# Altium PCB WeightPCB.PcbDoc
Units mil, origin at the board's own origin, x right, y up, seen from the top; angles counter-clockwise.
Board outline 2065 x 1130 mil, 2 copper layers (Top Layer, Bottom Layer); 4 components, 8 nets, 30 pads, 0 vias.
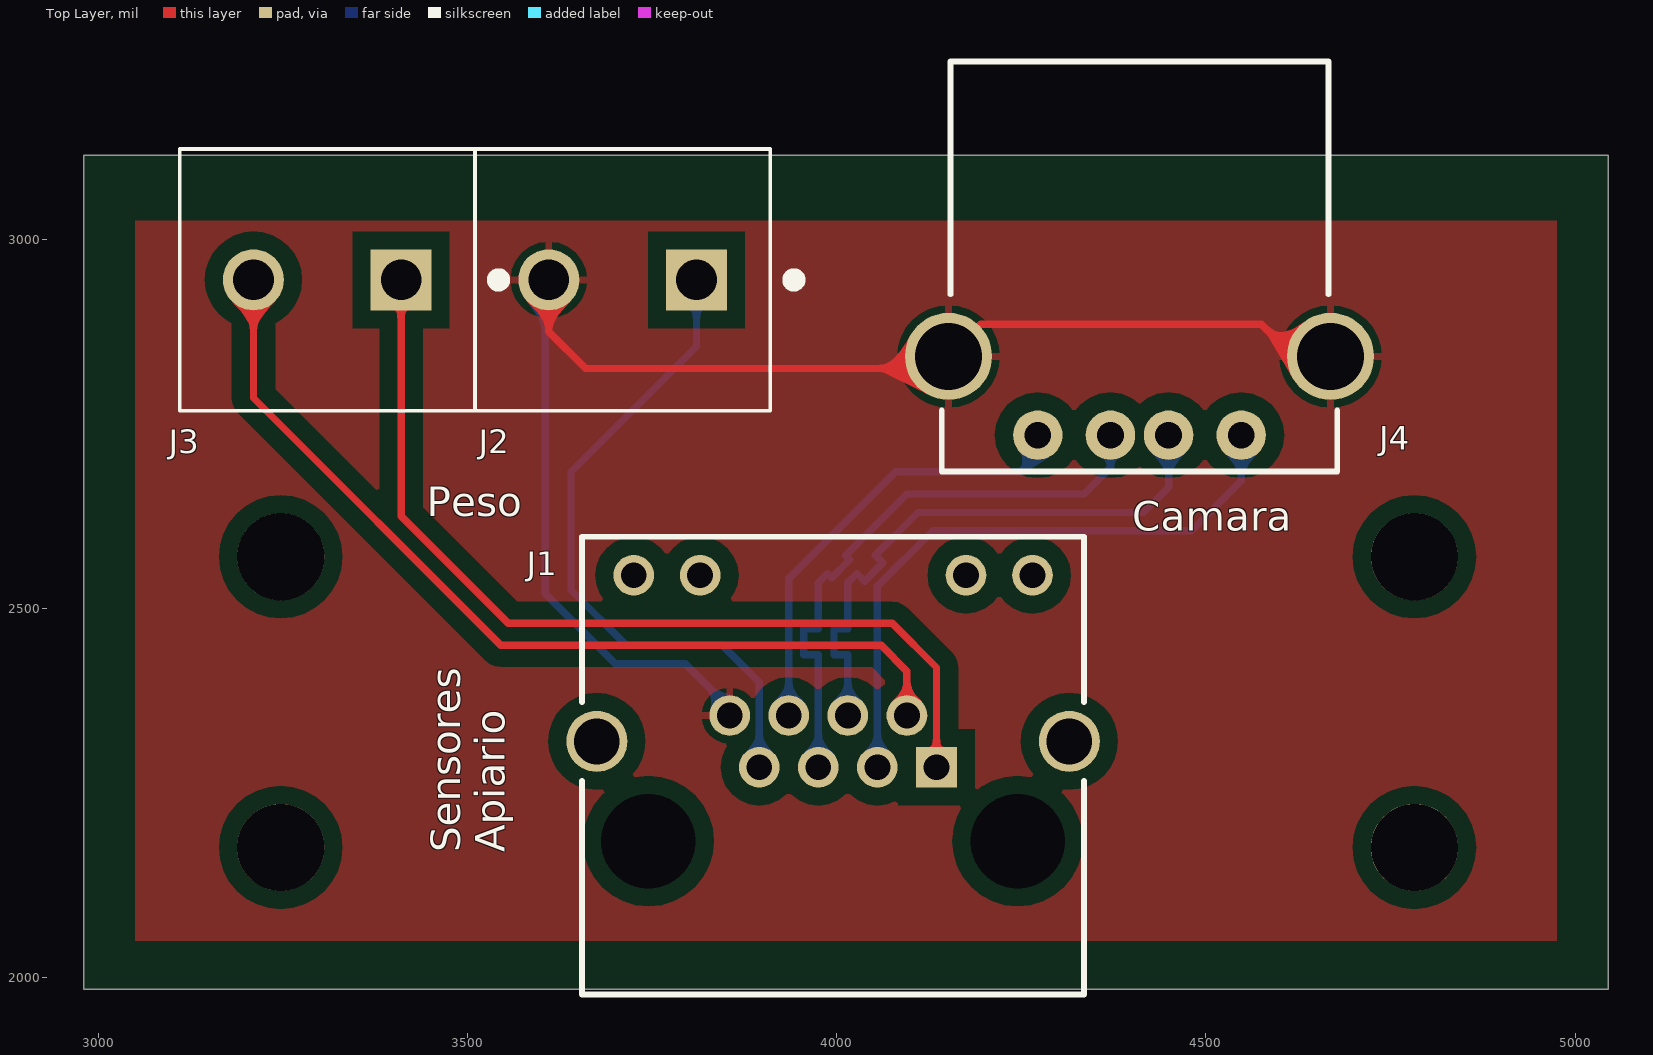
[diagram p0: Top Layer view]
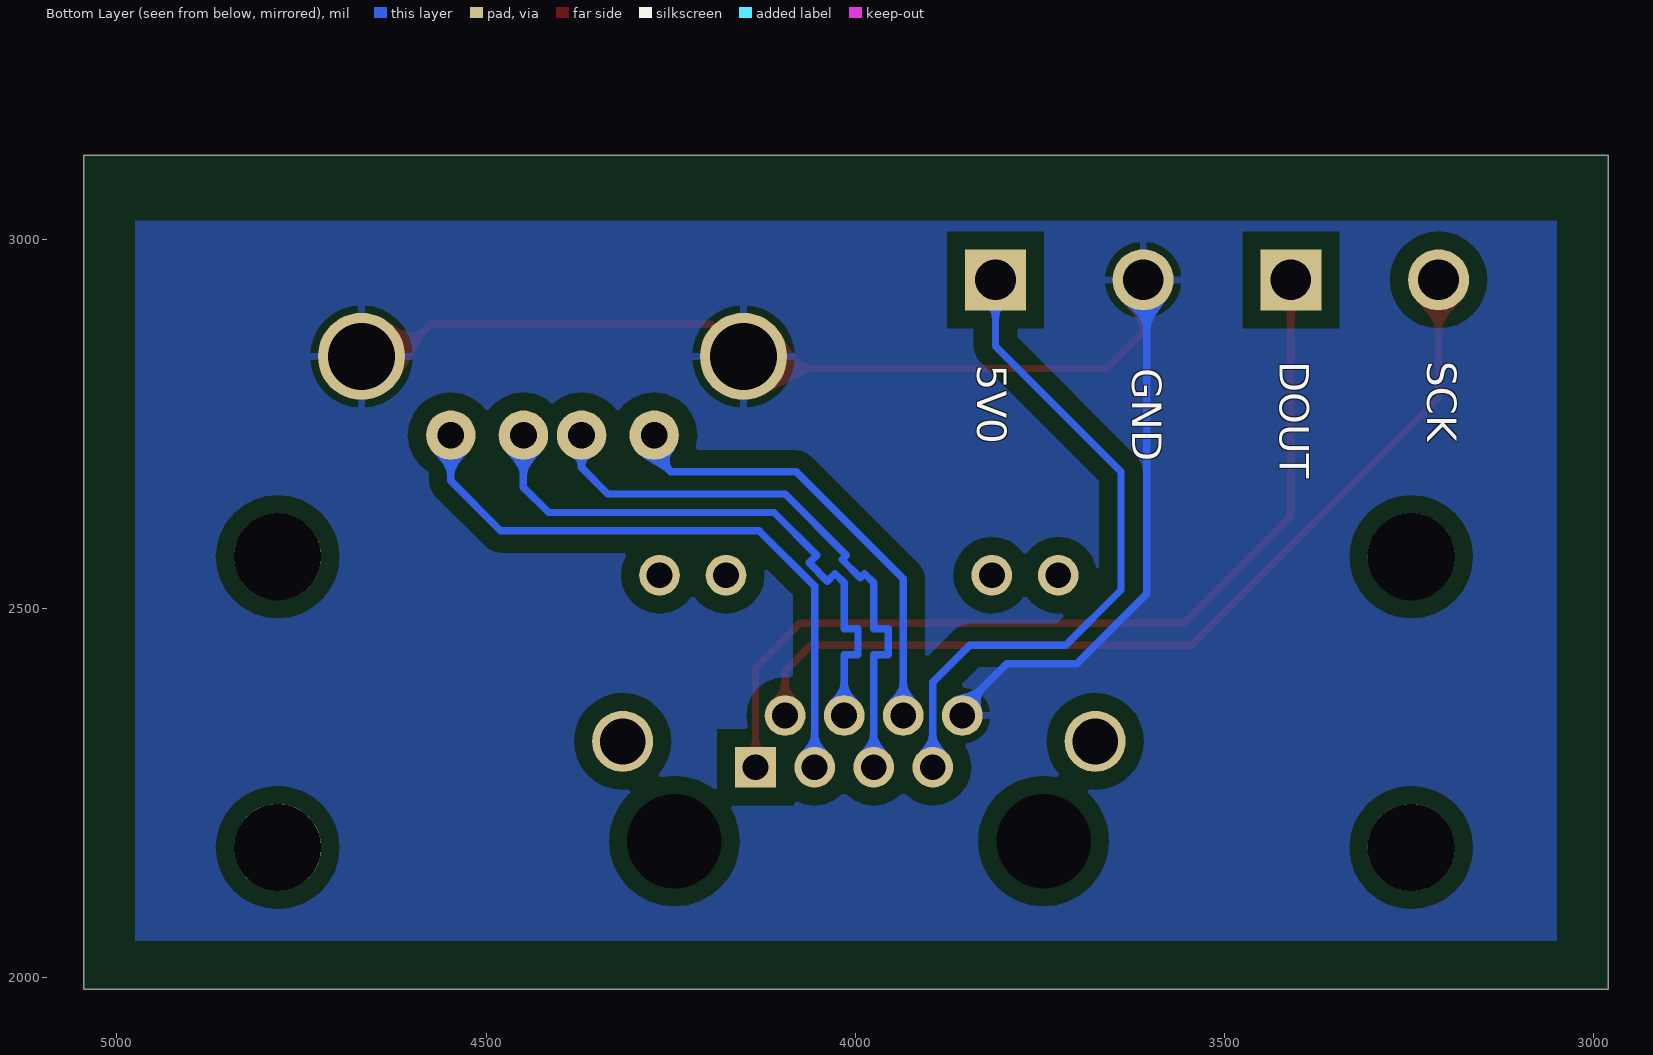
[diagram p1: Bottom Layer view, seen from below]
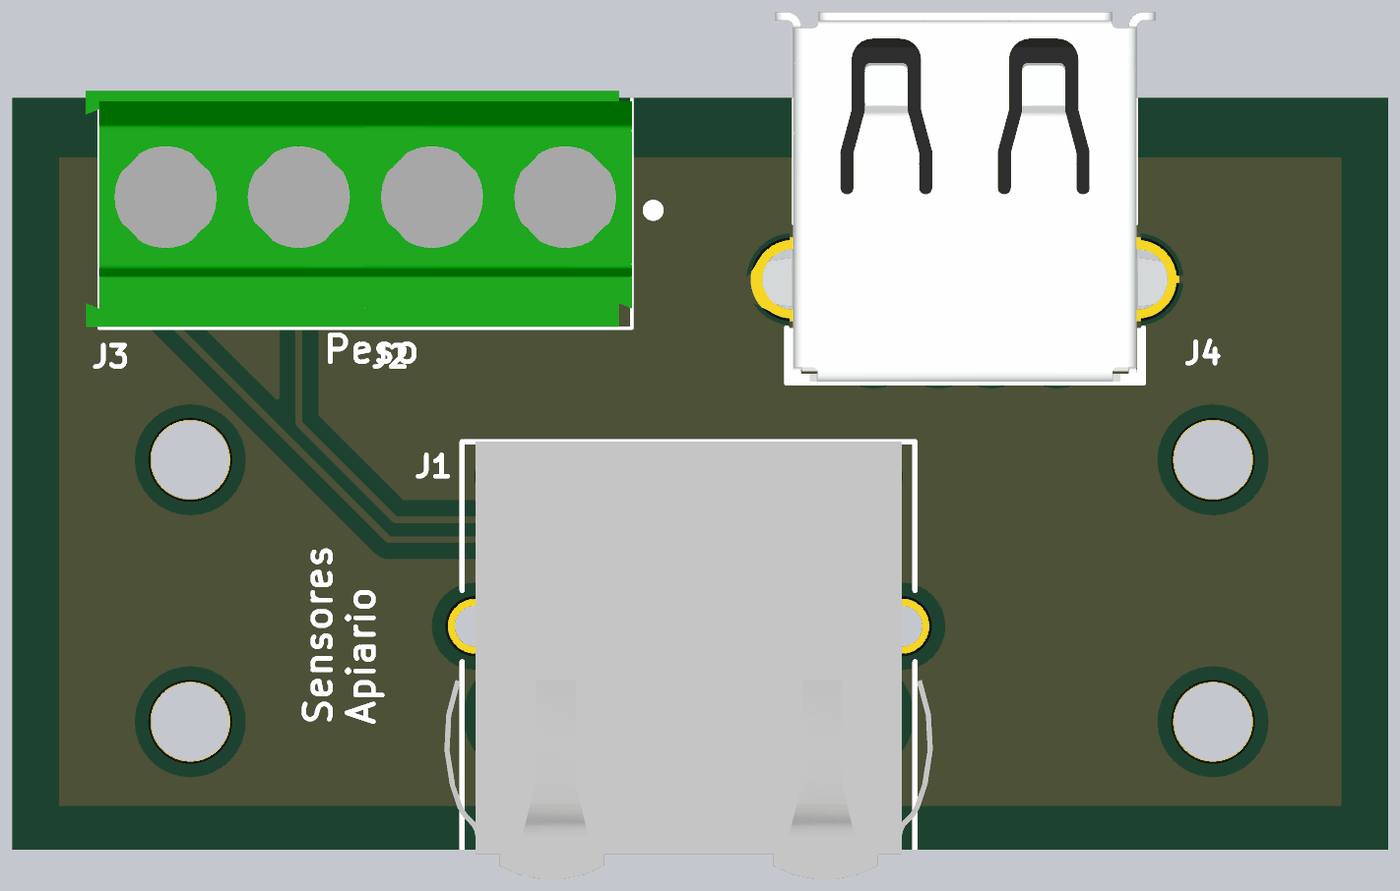
[diagram p2: 3D render of the assembled board from above, using the file's embedded part models]

## Layer stack, top to bottom
Top Solder: solder mask 0.4, Solder Resist, Dk 3.5
Top Layer: signal copper 1.4
Dielectric 1: dielectric 12.6, FR-4, Dk 4.8
Bottom Layer: signal copper 1.4
Bottom Solder: solder mask 0.4, Solder Resist, Dk 3.5

## Board outline
2980,1984.06 2980,3114.06 5045,3114.06 5045,1984.06

## Design rules (kind name [scope] priority, off if disabled: settings)
Clearance [All] p1: gap=6 except(24: Arc-Poly Track-Poly SMDPad-Poly THPad-Poly Via-Poly Fill-Poly Poly-Poly)
DiffPairsRouting [All] p1: maxlimit=10 minlimit=10 mostfreqgap=10 toplayer_minwidth=10 toplayer_maxwidth=15 toplayer_prefwidth=15 bottomlayer_minwidth=10 bottomlayer_maxwidth=15 bottomlayer_prefwidth=15 maxuncoupledlength=500
HoleSize [All] p1: absolutevalues=TRUE maxlimit=300 minlimit=1 maxpercent=80.000 minpercent=20.000
MinimumSolderMaskSliver [All] p1: minsoldermaskwidth=0
PlaneClearance [All] p1: clearance=32
PolygonConnect [All] p1: connectstyle=Relief reliefconductorwidth=10 reliefentries=4 polygonreliefangle="90 Angle" airgapwidth=10
RoomDefinition VALV2 [InComponentClass('VALV2')] p1: confinementstyle=ConfineIn formatcopy=TRUE lockcomponents=FALSE outline 9020,4674.45 9675,4674.45 9675,5955 9020,5955
RoomDefinition VALV1 [InComponentClass('VALV1')] p2: confinementstyle=ConfineIn formatcopy=TRUE lockcomponents=FALSE outline 9716.58,4674.45 10371.58,4674.45 10371.58,5955 9716.58,5955
RoomDefinition T1W2 [InComponentClass('T1W2')] p3: confinementstyle=ConfineIn formatcopy=TRUE lockcomponents=FALSE outline 10679.45,6500 10954.45,6500 10954.45,6790 10679.45,6790
RoomDefinition T1W1 [InComponentClass('T1W1')] p4: confinementstyle=ConfineIn formatcopy=TRUE lockcomponents=FALSE outline 10679.45,6800 10954.45,6800 10954.45,7090 10679.45,7090
RoomDefinition HS14 [InComponentClass('HS14')] p5: confinementstyle=ConfineIn formatcopy=TRUE lockcomponents=FALSE outline 10666.65,7098.5 10976.65,7098.5 10976.65,7388.5 10666.65,7388.5
RoomDefinition HS13 [InComponentClass('HS13')] p6: confinementstyle=ConfineIn formatcopy=TRUE lockcomponents=FALSE outline 10666.1,7385 10976.1,7385 10976.1,7675 10666.1,7675
RoomDefinition HS12 [InComponentClass('HS12')] p7: confinementstyle=ConfineIn formatcopy=TRUE lockcomponents=FALSE outline 10666.1,7675 10976.1,7675 10976.1,7965 10666.1,7965
RoomDefinition HS11 [InComponentClass('HS11')] p8: confinementstyle=ConfineIn formatcopy=TRUE lockcomponents=FALSE outline 10666.1,7965 10976.1,7965 10976.1,8255 10666.1,8255
RoutingTopology [All] p1: topology=Daisy_Simple
RoutingVias [All] p1: holewidth=28 width=50 viastyle="Through Hole" minholewidth=28 minwidth=50 maxholewidth=40 maxwidth=60
SilkToSilkClearance [All] p1: silktosilkclearance=0
SilkToSolderMaskClearance [IsPad] p1: minsilkscreentomaskgap=0 clearancetoexposedcopper=TRUE
SolderMaskExpansion SolderMaskExpansion_1 [IsVia] p1: expansion=0 soldermaskfromhole=TRUE
SolderMaskExpansion [All] p2: expansion=4
UnpouredPolygon [All] p1: allowunpoured=TRUE allowshelved=TRUE
Width [All] p1: maxlimit=40 minlimit=8 preferedwidth=16
22 further rules are at their usual default settings.

## Classes and differential pairs
differential pair D_BUS: +D_BUS_P -D_BUS_N

## Components (designator, comment, footprint, x,y, rotation, side; value= is the part's Value field where it differs from the comment)
J1 "2-406549-1" TECO-2-406549-1_V 3995,2320 r0 top
J2 "282841-2" TE_282841-2 3710,2945 r180 top
J3 "282841-2" TE_282841-2 3310,2945 r180 top
J4 "USB-A1HSW6" "ON SHORE TECHNOLOGY USB-A1HSW6" 4410,2965 r180 top

## Footprints (in the part's own frame and the unit in brackets; to place one, negate y for a bottom-side part, rotate by r counter-clockwise, add the part's x,y. Pads: shape width x height; smd on the part's side, far side on the other; paste and mask are expansions set on the pad)
"ON SHORE TECHNOLOGY USB-A1HSW6" [mm] "USB2.0 TYPEA 4 Pin Pitch 2-2.5mm"
  round 1.7 hole 0.92: 1(-3.5,5.85) 2(-1,5.85) 3(1,5.85) 4(3.5,5.85)
  round 3 hole 2.3: S(-6.57,3.14) S(6.57,3.14)
  silkscreen extent -6.8,-7 6.8,7.1, body extent -7.9,-7.05 7.9,7.05, height 7.6
TE_282841-2 [mm]
  rect 2.1x2.1 hole 1.4: 1(-2.54,0)
  round 2.1 hole 1.4: 2(2.54,0)
  silkscreen extent -6.09,-4.5 5.08,4.5, body extent -5.08,-4.55 5.58,4.45, height 15.21
TECO-2-406549-1_V [mm] "Connector, 12-Leads, Body 17.27x15.75mm, Pitch 1.016mm"
  rect 1.4x1.4 hole 0.89: 1(3.556,-0.889)
  round 1.4 hole 0.89: 2(2.54,0.889) 3(1.524,-0.889) 4(0.508,0.889) 5(-0.508,-0.889) 6(-1.524,0.889) 7(-2.54,-0.889) 8(-3.556,0.889) 9(-4.572,5.715) 10(-6.858,5.715) 11(6.858,5.715) 12(4.572,5.715)
  round 0 hole 3.251 unplated: MH1(6.35,-3.429) MH2(-6.35,-3.429)
  round 2.1 hole 1.575: S1(8.128,0) S2(-8.128,0)
  silkscreen extent -8.63,-8.71 8.64,7.04, body extent -9.32,-9.68 9.32,7.04, height 14.61

## Part data
J1: library part CMP-2000-05541-1, "RJ45 Connector, Pitch 1.016 mm, 8 Position, Height 14.22 mm, Tail Length 3.18 mm, RoHS, Tray"
J2 J3: "Conn Terminal Block 2 POS 5.08mm Solder ST Thru-Hole 17.5A/Contact"
J4: "CONN RCPT TYPEA 4POS R/A"

## Free pads (board coordinates)
  round 118.11 hole 118.11: ""(3246.89,2176.34) ""(3246.89,2570.04) ""(4782.32,2176.34) ""(4782.32,2570.04)

## Nets (pads, with @x,y where several pads share a name; then routed paths per layer and width w, separated by ;. In a path a pad name is that pad's centre, name@x,y a point inside that pad or via, vN(x,y) a via of type N, cw(c..) or ccw(c..) an arc to the next point about the centre after c; other vN are vias at no path point)
5V0: J1.7 J2.1 | length 902.2
  Bottom Layer w10: J2.1 3810,2855 3640,2685 3640,2525 3715,2450 3845,2450 3895,2400 J1.7@3895,2295
D_BUS_N: J1.5 J4.3 | length 805
  Bottom Layer w10: J1.5@3975,2290 3975,2420 3975,2437.5 3955.18,2437.5 3955.18,2472.5 3975,2472.5 3975,2535 3987.37,2547.37 3993.11,2541.64 4017.85,2566.39 4012.12,2572.12 4095,2655 4112.5,2655 4335,2655 4370.63,2690.63 J4.3
D_BUS_P: J1.4 J4.2 | length 800
  Bottom Layer w10: J1.4@4015,2360 4015,2420 4015,2437.5 3996.23,2437.5 3996.23,2472.5 4015,2472.5 4015,2535 4027.37,2547.37 4037.69,2537.06 4062.44,2561.8 4052.12,2572.12 4110,2630 4415,2630 4449.37,2664.37 J4.2
GND: J1.8 J2.2 J4.S | length 1933.6
  Top Layer w10: J2.2 3610,2875 3660,2825 4134.96,2825 4151.34,2841.38 4194.96,2885 4575,2885 4618.62,2841.38 J4.S@4668.66,2841.38
  Bottom Layer w10: J2.2 3605,2940 3605,2520 3700,2425 3795,2425 J1.8@3855,2365
GND_BUS: J1.6 J4.4 | length 613.9
  Bottom Layer w10: J1.6@3935,2360 3935,2540 4080,2685 4250,2685 4272.2,2707.2 J4.4
V_BUS: J1.3 J4.1 | length 853.8
  Bottom Layer w10: J1.3@4055,2290 4055,2530 4130,2605 4480,2605 4547.8,2672.8 J4.1
W_DOUT: J1.1 J3.1 | length 1254.9
  Top Layer w10: J3.1 3410,2625 3555,2480 4075,2480 4135,2420 J1.1@4135,2295
W_SCK: J1.2 J3.2 | length 1248.3
  Top Layer w10: J3.2 3210,2785 3545,2450 4060,2450 4095,2415 J1.2@4095,2365
pads on no net: J1.9 J1.10 J1.11 J1.12 J1.MH1 J1.MH2 J1.S1 J1.S2

## Polygon pours and split planes (outlines as drawn)
GND on Top Layer "GroundPlaneT" (solid, pour order 0): 3050,3025 4975,3025 4975,2050 3050,2050 3050,3020
GND on Bottom Layer "GroundPlaneT" (solid, pour order 2): 3050,3025 4975,3025 4975,2050 3050,2050 3050,3020

## Silkscreen, mask and mechanical layers (free items; w line width, h text height)
Top Overlay:
  text "Peso" at 3445,2625 h40
  text "Camara" at 4400,2605 h40
  text "Sensores / Apiario" at 3550,2170 h40 r90
Bottom Overlay:
  text "SCK" at 3225,2835 h40 r90
  text "DOUT" at 3425,2835 h40 r90
  text "5V0" at 3835,2830 h40 r90
  text "GND" at 3625,2825 h40 r90
Mechanical 1:
  the board outline again, w6

## Dimensions
3246.89,2176.34 to 3246.89,2570.04 on Mechanical 13
3246.89,2176.34 to 2980,1984.06 on Mechanical 13
3246.89,2176.34 to 4782.32,2176.34 on Mechanical 13
3246.89,2176.34 to 2980,1984.06 on Mechanical 13
5045,3114.06 to 5045,1984.06 on Mechanical 13
2980,3114.06 to 5045,3114.06 on Mechanical 13